# EAGLE board FFC_pcb_v1_double_layer (EAGLE 9.2.0)
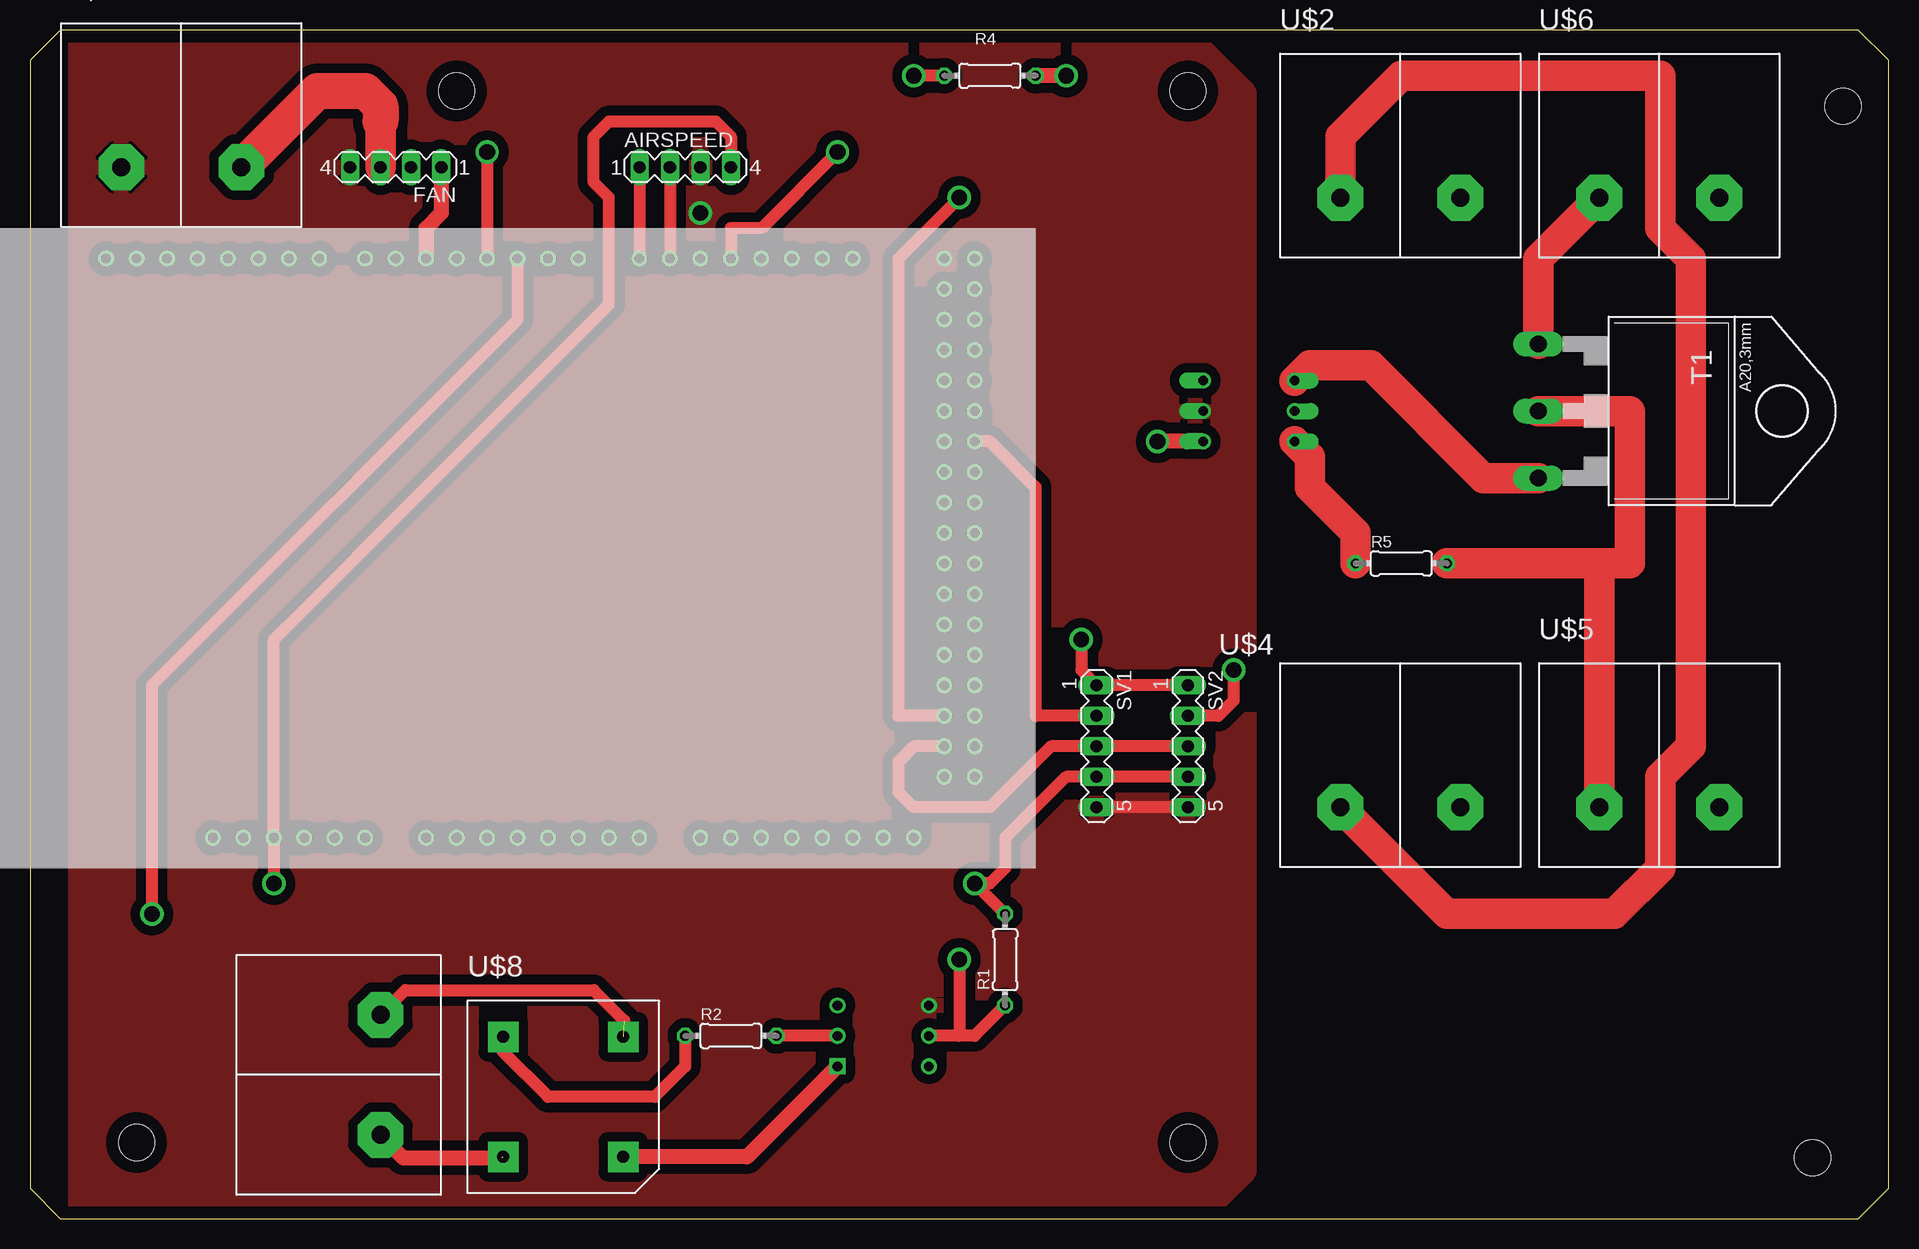
[diagram p0: board, top side]
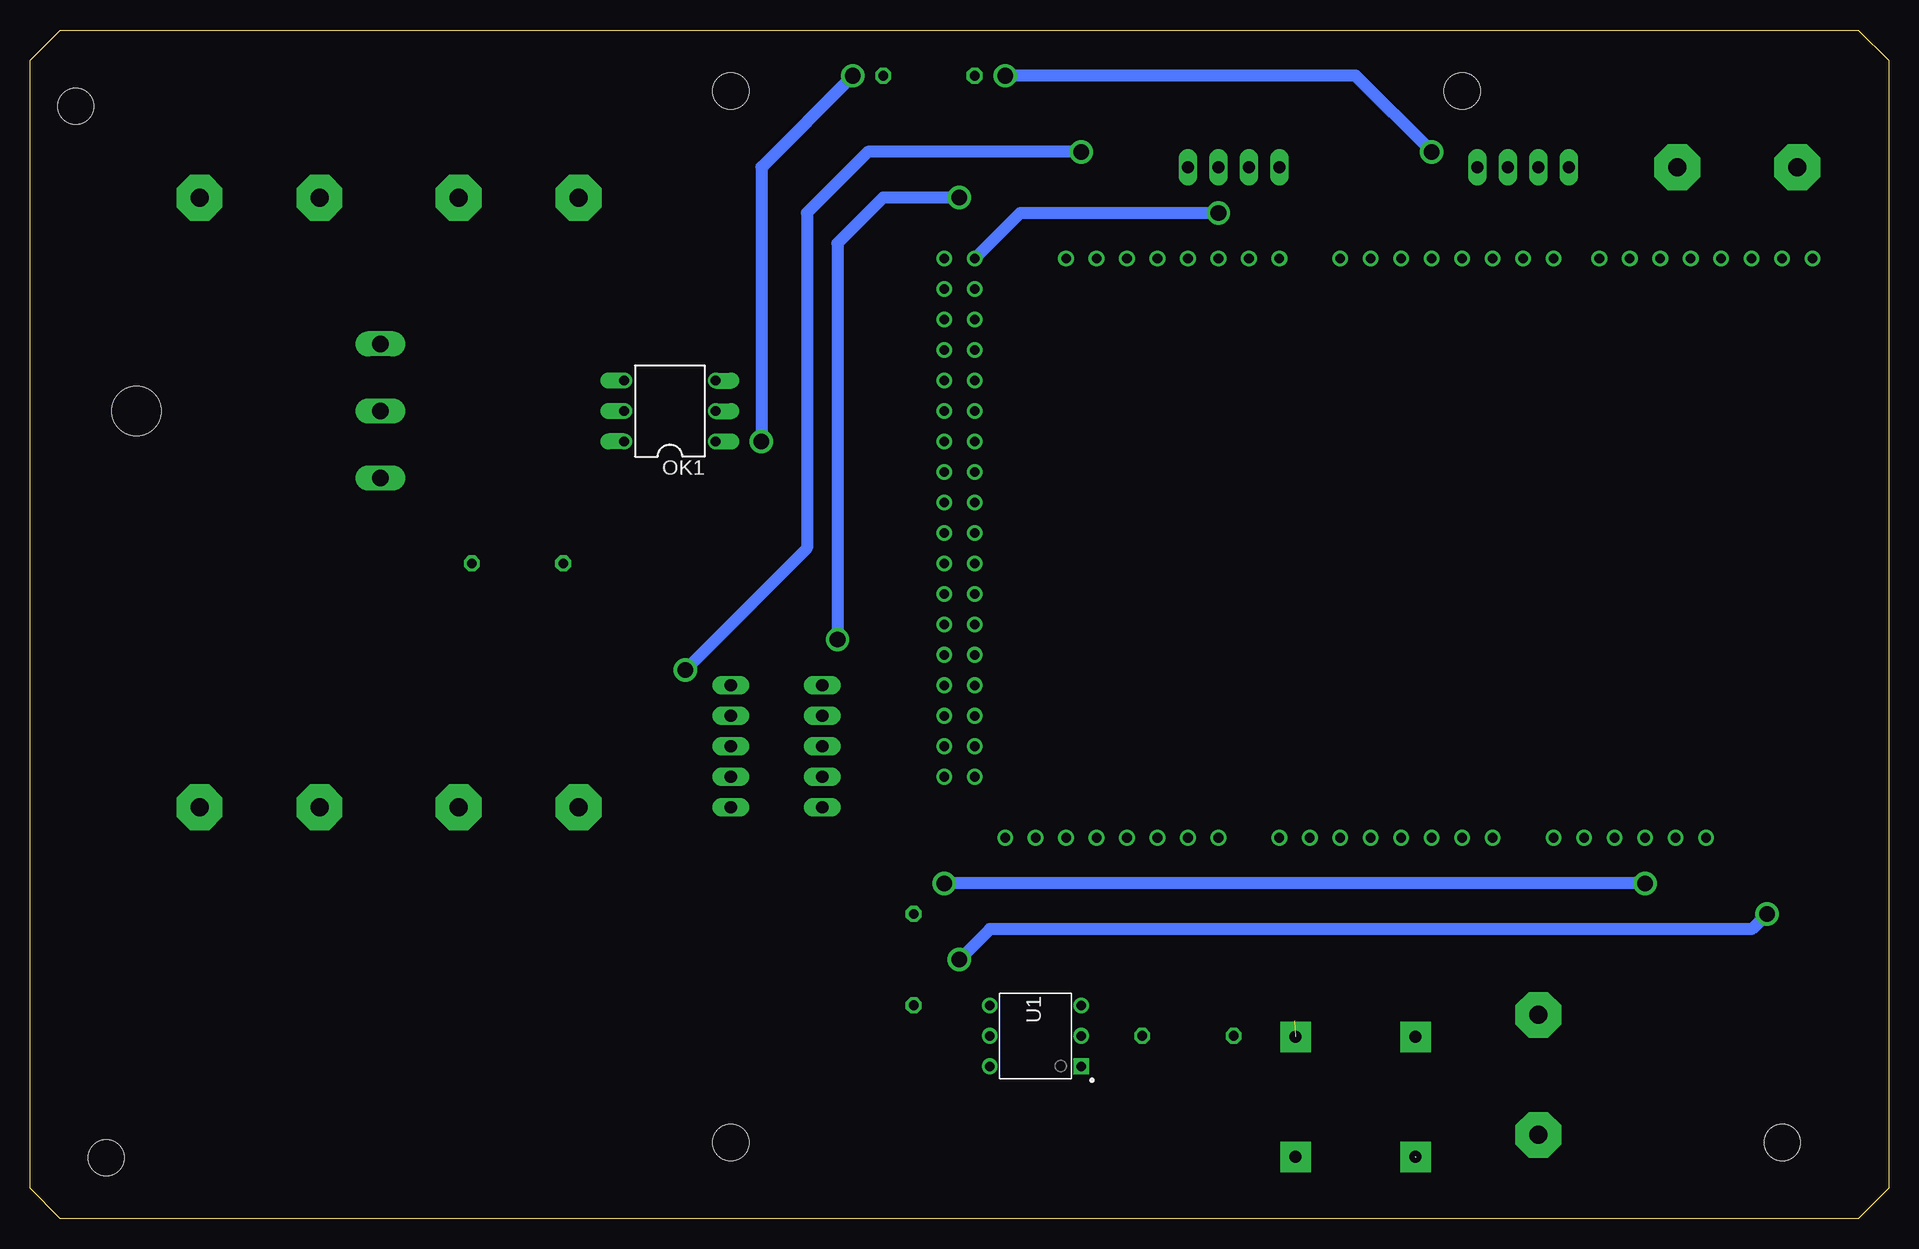
[diagram p1: board, bottom side, seen from below]

Size 154.94 x 99.06 mm. Coordinates in mm from the lower left corner, seen from the top.
Outline: 2.54,0 152.4,0 154.94,2.54 154.94,96.52 152.4,99.06 2.54,99.06 0,96.52 0,2.54 2.54,0
Copper layers (1*16): Top 0.035mm / dielectric 1.5mm / Bottom 0.035mm
Design rules "default *": minimum track width 12mil, minimum drill 0.35mm, track to track 0.8mm, track to pad 0.8mm, pad to pad 0.8mm, via to via 0.8mm, smd to smd 0.8mm, copper to edge 40mil, drill to drill 12mil, minimum pad ring 10mil, minimum via ring 8mil, stop-mask expansion 4mil, vias tented up to drill 0mil, thermal gap 10mil
Holes 3 mm at 8.89,6.35 96.52,6.35 96.52,93.98 35.56,93.98 151.13,92.71 148.59,5.08

## Footprints (pad centres in the part's own frame; a part is rotated, then mirrored left to right if it is on the bottom)
MA04-1 = drill 1.016 long: 1 -3.81,0; 2 -1.27,0; 3 1.27,0; 4 3.81,0
DIL06 = drill 0.813 offset: 1 -2.54,-3.81; 2 0,-3.81; 3 2.54,-3.81; 4 2.54,3.81; 5 0,3.81; 6 -2.54,3.81
0204/7 = drill 0.813 octagon: 1 -3.81,0; 2 3.81,0
MA05-1 = drill 1.016 long: 1 -5.08,0; 2 -2.54,0; 3 0,0; 4 2.54,0; 5 5.08,0
TOP3L-1 = drill 1.397 long: A1 -5.588,-7.62; A2 0,-7.62; G 5.588,-7.62 | hole 4.115: 0,12.7
DIP762W50P254L712H400Q6N = drill 0.8 square: 1 -3.81,2.54 | drill 0.8: 2 -3.81,0; 3 -3.81,-2.54; 4 3.81,-2.54; 5 3.81,0; 6 3.81,2.54
MEGABOX = drill 0.8: 0 12.7,24.13; 1 10.16,24.13; 2 7.62,24.13; 3 5.08,24.13; 3V3 -15.24,-24.13; 4 2.54,24.13; 5 0,24.13; 5V -12.7,-24.13; 6 -2.54,24.13; 7 -5.08,24.13; 8 -8.89,24.13; 9 -11.43,24.13; 10 -13.97,24.13; 11 -16.51,24.13; 12 -19.05,24.13; 13 -21.59,24.13; 14 17.78,24.13; 15 20.32,24.13; 16 22.86,24.13; 17 25.4,24.13; 18 27.94,24.13; 19 30.48,24.13; 20 33.02,24.13; 21 35.56,24.13; 22 43.18,21.59; 23 45.72,21.59; 24 43.18,19.05; 25 45.72,19.05; 26 43.18,16.51; 27 45.72,16.51; 28 43.18,13.97; 29 45.72,13.97; 30 43.18,11.43; 31 45.72,11.43; 32 43.18,8.89; 33 45.72,8.89; 34 43.18,6.35; 35 45.72,6.35; 36 43.18,3.81; 37 45.72,3.81; 38 43.18,1.27; 39 45.72,1.27; 40 43.18,-1.27; 41 45.72,-1.27; 42 43.18,-3.81; 43 45.72,-3.81; 44 43.18,-6.35; 45 45.72,-6.35; 46 43.18,-8.89; 47 45.72,-8.89; 48 43.18,-11.43; 49 45.72,-11.43; 50 43.18,-13.97; 51 45.72,-13.97; 52 43.18,-16.51; 53 45.72,-16.51; A0 0,-24.13; A1 2.54,-24.13; A2 5.08,-24.13; A3 7.62,-24.13; A4 10.16,-24.13; A5 12.7,-24.13; A6 15.24,-24.13; A7 17.78,-24.13; A8 22.86,-24.13; A9 25.4,-24.13; A10 27.94,-24.13; A11 30.48,-24.13; A12 33.02,-24.13; A13 35.56,-24.13; A14 38.1,-24.13; A15 40.64,-24.13; AREF -26.67,24.13; GND@1 -24.13,24.13; GND@2 -10.16,-24.13; GND@3 -7.62,-24.13; GND@4 43.18,24.13; GND@5 45.72,24.13; GND@6 43.18,-19.05; GND@7 45.72,-19.05; RESET -17.78,-24.13; VIN -5.08,-24.13
COVERED_TERMINAL_2PINS = drill 1.5 pad 3.81 octagon: 1 0,0; 2 10,0
BRIDGE = drill 1 pad 2.54 square: 1 -5,-5; 2 5,-5; 3 5,5; 4 -5,5

## Placement (x,y rotation side)
AIRSPEED  [MA04-1]  54.61,87.63 0 top
FAN  [MA04-1]  30.48,87.63 180 top
OK1  MOC3022M  [DIL06]  101.6,67.31 90 bottom
R1  [0204/7]  81.28,21.59 90 top
R2  [0204/7]  58.42,15.24 0 top
R4  [0204/7]  80.01,95.25 0 top
R5  [0204/7]  114.3,54.61 0 top
SV1  thermo1  [MA05-1]  88.9,39.37 270 top
SV2  thermo2  [MA05-1]  96.52,39.37 270 top
T1  BTA26-H  [TOP3L-1]  133.35,67.31 270 top
U1  4N25  [DIP762W50P254L712H400Q6N]  71.12,15.24 180 bottom
U$1  MEGA_DEVICE  [MEGABOX]  33.02,55.88 0 top
U$2  heater_ground  [COVERED_TERMINAL_2PINS]  109.22,85.09 0 top
U$3  12vac  [COVERED_TERMINAL_2PINS]  29.21,6.99 90 top
U$4  ground220  [COVERED_TERMINAL_2PINS]  109.22,34.29 0 top
U$5  hot220  [COVERED_TERMINAL_2PINS]  130.81,34.29 0 top
U$6  heater_hot  [COVERED_TERMINAL_2PINS]  130.81,85.09 0 top
U$7  12VDC  [COVERED_TERMINAL_2PINS]  7.62,87.63 0 top
U$8  BRIDGE  [BRIDGE]  44.45,10.16 0 top

## Library data of the parts
AIRSPEED FAN SV1 SV2 = con-lstb; OC_FARNELL: unknown; OC_NEWARK: unknown
OK1 = optocoupler; MF: FAIRCHILD SEMICONDUCTOR; MPN: MOC3022-M; OC_FARNELL: 1021086; OC_NEWARK: 58K1956
R1 R2 R4 R5 = eagle-ltspice; SPICEMODEL: NONE; SPICEPREFIX: R
T1 = triac
U1 = 4N25; AVAILABILITY: Unavailable; DESCRIPTION: Optocoupler DC-IN 1-CH Transistor With Base DC-OUT 6-Pin PDIP; MF: Vishay Semiconductor; MP: 4N25; PACKAGE: DIP-6 Lite-On; PRICE: None
U$1 = ArduinoMegaSymbol
U$2-U$8 = gh_library

## Nets
GND: AIRSPEED.3 FAN.4 OK1.2 SV1.5 SV2.5 U1.4 U$1.GND@4 U$7.1
N$1: R1.1 U1.5 U$1.2
N$2: OK1.6 R5.1
N$3: U1.1 U$8.2
N$4: R4.1 U$1.3
N$5: OK1.1 R4.2
N$6: R5.2 T1.A2 U$5.1
N$7: T1.A1 U$6.1
N$8: R2.1 U$8.4
N$9: OK1.4 T1.G
N$10: U$2.1 U$4.1
N$11: U$3.1 U$8.1
N$12: U$3.2 U$8.3
N$13: R2.2 U1.2
N$14: SV2.2 U$1.17
N$15: FAN.1 U$1.5
N$16: FAN.3 U$7.2
N$35: U$1.23
N$40: SV1.2 U$1.33
N$51: AIRSPEED.4 R1.2 SV1.4 SV2.4 U$1.5V
N$54: SV1.3 SV2.3 U$1.52
N$58: AIRSPEED.2 U$1.15
N$59: AIRSPEED.1 U$1.14
N$66: U$1.8
N$67: U$1.9
N$68: U$1.10
N$69: U$1.11
N$70: SV1.1 SV2.1 U$1.50

## Tracks (layer width: path | path; a pad name or v marks a point on that pad's centre or on a via)
GND  (via drill 1.3)
  Top 1.016: SV2.5 SV1.5
  Bottom 1.016: U$1.GND@4 72.39,83.82 v55.88,83.82
  pour Top: 3.81,97.79 97.79,97.79 101.6,93.98 101.6,3.81 99.06,1.27 3.81,1.27
N$1  (via drill 1.3)
  Top 1.016: U$1.2 40.64,74.93 10.16,44.45 v10.16,25.4 | R1.1 78.74,15.24 77.47,15.24 | 77.47,15.24 U1.5 | v77.47,21.59 77.47,15.24
  Bottom 1.016: v10.16,25.4 11.43,24.13 74.93,24.13 v77.47,21.59
N$2
  Top 2.54: R5.1 110.49,57.15 106.68,60.96 106.68,63.5 OK1.6
N$3
  Top 1.27: U$8.2 59.77,5.16 U1.1
N$4  (via drill 1.3)
  Top 1.016: v38.1,88.9 U$1.3 | R4.1 v73.66,95.25
  Bottom 1.016: v38.1,88.9 44.45,95.25 v73.66,95.25
N$5  (via drill 1.3)
  Top 1.27: OK1.1 v93.98,64.77 | v86.36,95.25 R4.2
  Bottom 1.016: v86.36,95.25 93.98,87.63 v93.98,64.77
N$6
  Top 2.54: T1.A2 133.35,67.31 133.35,54.61 130.81,54.61 | 130.81,54.61 U$5.1 | 130.81,54.61 R5.2
N$7
  Top 2.54: U$6.1 125.73,80.01 T1.A1
N$8
  Top 1.016: R2.1 54.61,12.7 52.07,10.16 43.18,10.16 39.37,13.97 39.45,14.05 U$8.4
N$9
  Top 2.54: T1.G 121.16,61.72 111.76,71.12 106.68,71.12 OK1.4
N$10
  Top 2.54: U$4.1 118.11,25.4 132.08,25.4 135.89,29.21 135.89,36.83 138.43,39.37 138.43,80.01 135.89,82.55 135.89,95.25 114.3,95.25 109.22,90.17 U$2.1
N$11  (1 unrouted)
  Top 1.016: 30.48,5.71 U$3.1
  Top 1.27: U$3.1 31.11,5.08 39.37,5.08
N$12  (1 unrouted)
  Top 1.016: U$3.2 31.27,19.05 46.99,19.05 49.53,16.51
N$13
  Top 1.016: U1.2 R2.2
N$14  (via drill 1.3)
  Top 1.016: v67.31,88.9 60.96,82.55 58.42,82.55 U$1.17 | SV2.2 99.06,41.91 100.33,43.18 v100.33,45.72
  Bottom 1.016: v67.31,88.9 85.09,88.9 90.17,83.82 90.17,55.88 v100.33,45.72
N$15
  Top 1.27: FAN.1 34.29,83.82 33.02,82.55 U$1.5
N$16
  Top 2.54: FAN.3 29.21,91.44
  Top 3: U$7.2 23.97,93.98 27.94,93.98 29.21,92.71 29.21,91.44
N$40
  Top 1.016: SV1.2 83.82,41.91 83.82,60.96 80.01,64.77 U$1.33
N$51  (via drill 1.3)
  Top 1.016: v20.32,27.94 U$1.5V 20.32,48.26 48.26,76.2 48.26,85.09 46.99,86.36 46.99,90.17 48.26,91.44 57.15,91.44 58.42,90.17 AIRSPEED.4 | R1.2 v78.74,27.94 80.01,27.94 81.28,29.21 81.28,31.75 86.36,36.83 SV1.4 SV2.4
  Bottom 1.016: v20.32,27.94 v78.74,27.94
N$54
  Top 1.016: SV2.3 SV1.3 85.09,39.37 80.01,34.29 73.66,34.29 72.39,35.56 72.39,38.1 73.66,39.37 U$1.52
N$58
  Top 1.016: AIRSPEED.2 U$1.15
N$59
  Top 1.016: AIRSPEED.1 U$1.14
N$70  (via drill 1.3)
  Top 1.016: U$1.50 72.39,41.91 72.39,80.01 v77.47,85.09 | SV2.1 SV1.1 87.63,45.72 v87.63,48.26
  Bottom 1.016: v77.47,85.09 83.82,85.09 87.63,81.28 v87.63,48.26